# EAGLE board PreampUX (EAGLE 5.10)
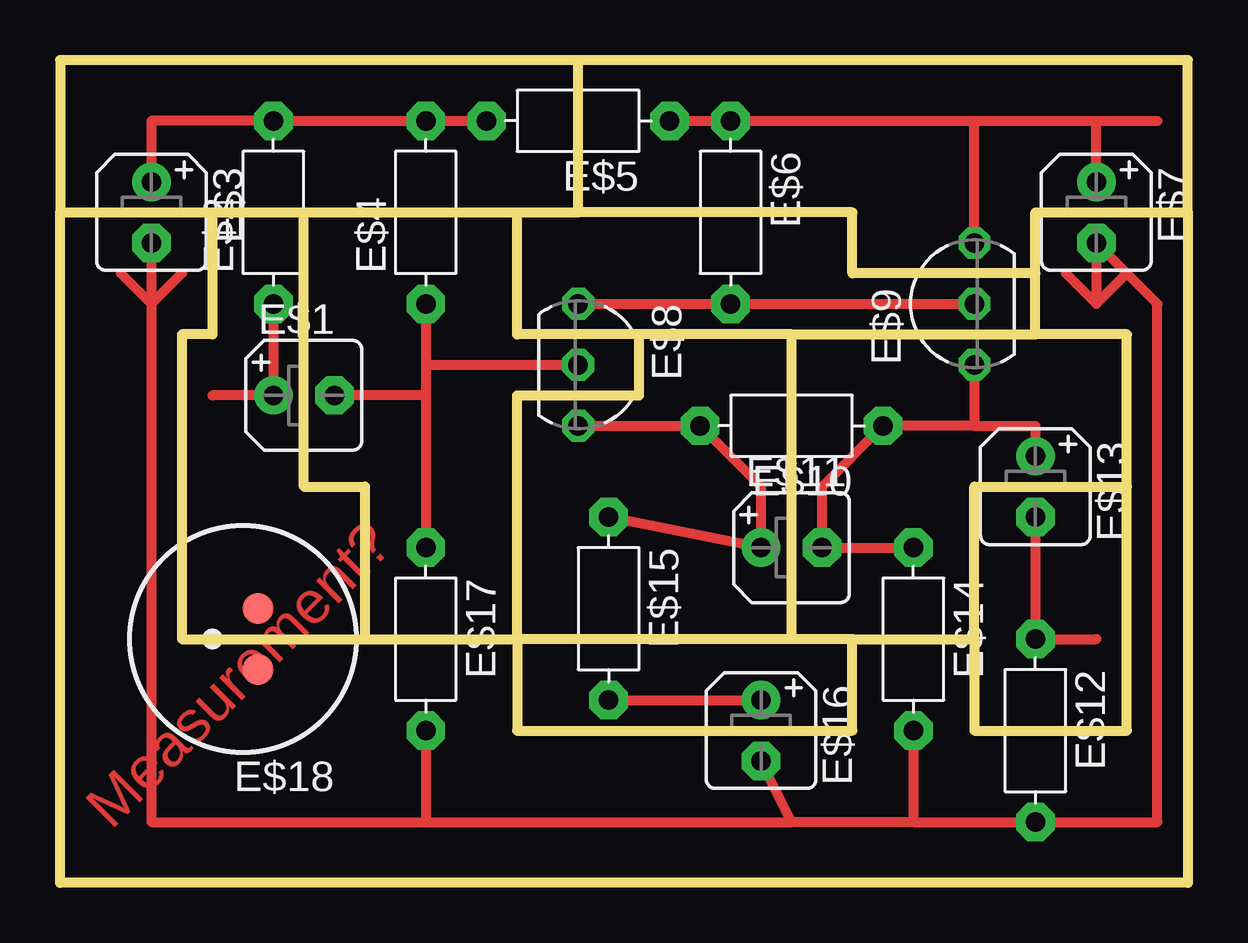
[diagram p0: board, top side]

Size 46.99 x 34.29 mm. Coordinates in mm from the lower left corner, seen from the top.
Outline: 6.35,27.94 6.35,22.86 5.08,22.86 5.08,16.51 5.08,10.16 12.7,10.16
Outline: 12.7,10.16 12.7,16.51 10.16,16.51 10.16,27.94
Outline: 12.7,10.16 13.97,10.16 19.05,10.16
Outline: 19.05,10.16 19.05,6.35 33.02,6.35 33.02,10.16
Outline: 33.02,10.16 38.1,10.16
Outline: 38.1,10.16 38.1,6.35 44.45,6.35 44.45,16.51
Outline: 44.45,16.51 44.45,22.86 40.64,22.86
Outline: 40.64,22.86 40.64,25.4
Outline: 40.64,25.4 40.64,27.94 46.99,27.94
Outline: 46.99,27.94 46.99,0 0,0 0,27.94
Outline: 0,27.94 6.35,27.94
Outline: 6.35,27.94 10.16,27.94
Outline: 10.16,27.94 19.05,27.94
Outline: 19.05,27.94 21.59,27.94
Outline: 21.59,27.94 21.59,34.29
Outline: 21.59,34.29 0,34.29 0,27.94
Outline: 46.99,27.94 46.99,34.29 21.59,34.29
Outline: 40.64,25.4 33.02,25.4 33.02,27.94 21.59,27.94
Outline: 38.1,10.16 38.1,16.51 44.45,16.51
Outline: 33.02,10.16 30.48,10.16
Outline: 30.48,10.16 30.48,22.86
Outline: 30.48,22.86 40.64,22.86
Outline: 30.48,10.16 19.05,10.16
Outline: 19.05,10.16 19.05,20.32 24.13,20.32 24.13,22.86
Outline: 24.13,22.86 19.05,22.86 19.05,27.94
Outline: 30.48,22.86 24.13,22.86
Copper layers (1*16): Top 0.035mm / dielectric 1.5mm / Bottom 0.035mm
Design rules "default": minimum track width 10mil, minimum drill 24mil, track to track 8mil, track to pad 8mil, pad to pad 8mil, via to via 8mil, smd to smd 8mil, copper to edge 40mil, drill to drill 8mil, minimum pad ring 10mil, minimum via ring 8mil, stop-mask expansion 4mil, vias tented up to drill 0mil, thermal gap 10mil

## Footprints (pad centres in the part's own frame; a part is rotated, then mirrored left to right if it is on the bottom)
B45181A = drill 0.813 pad 1.6 round: + -1.27,0 | drill 0.813 pad 1.6 octagon: - 1.27,0
R-7,5 = drill 0.813 pad 1.6 octagon: 1 -3.81,0; 2 3.81,0
TO92- = drill 0.813 octagon: 1 -2.54,0; 2 0,0; 3 2.54,0
F9745AL = smd 1.3 x 1.3: 1 -0.635,1.27; 2 -0.635,-1.27

## Placement (x,y rotation side)
E$1  100nf  [B45181A]  10.16,20.32 0 top
E$2  10k  [R-7,5]  8.89,27.94 90 top
E$3  10uf  [B45181A]  3.81,27.94 270 top
E$4  100k  [R-7,5]  15.24,27.94 90 top
E$5  2.2k  [R-7,5]  21.59,31.75 180 top
E$6  22k  [R-7,5]  27.94,27.94 270 top
E$7  100uf  [B45181A]  43.18,27.94 270 top
E$8  [TO92-]  21.59,21.59 270 top
E$9  [TO92-]  38.1,24.13 90 top
E$10  2.2k  [R-7,5]  30.48,19.05 180 top
E$11  1.5nf  [B45181A]  30.48,13.97 0 top
E$12  100k  [R-7,5]  40.64,6.35 270 top
E$13  10uf  [B45181A]  40.64,16.51 270 top
E$14  2.2k  [R-7,5]  35.56,10.16 270 top
E$15  100  [R-7,5]  22.86,11.43 270 top
E$16  22uf  [B45181A]  29.21,6.35 270 top
E$17  150k  [R-7,5]  15.24,10.16 270 top
E$18  [F9745AL]  7.62,10.16 180 top

## Library data of the parts
E$1 E$3 E$7 E$11 E$13 E$16 = rcl
E$2 E$4-E$6 E$10 E$12 E$14 E$15 E$17 = discrete
E$8 E$9 = maxim
E$18 = microphon

## Nets
S$1: E$1.+ E$2.1
S$2: E$2.2 E$3.+ E$4.2 E$5.2
S$3: E$3.- E$7.- E$12.2 E$14.2 E$16.- E$17.2
S$4: E$1.- E$4.1 E$8.2 E$17.1
S$5: E$5.1 E$7.+ E$9.3
S$7: E$6.2 E$8.1 E$9.2
S$8: E$8.3 E$10.2 E$11.+ E$15.1
S$9: E$9.1 E$10.1 E$11.- E$13.+ E$14.1
S$10: E$13.-
S$12: E$15.2 E$16.+

## Tracks (layer width: path | path; a pad name or v marks a point on that pad's centre or on a via)
S$1
  Top 0.406: 6.35,20.32 E$1.+ E$2.1
S$2
  Top 0.406: E$3.+ 3.81,31.75 E$2.2 E$4.2 E$5.2
S$3
  Top 0.406: E$3.- 3.81,24.13 | 5.08,25.4 3.81,24.13 | 3.81,24.13 2.54,25.4 | 3.81,24.13 3.81,2.54 15.24,2.54 | E$17.2 15.24,2.54 | E$14.2 35.56,2.54 | 35.56,2.54 E$12.2 45.72,2.54 45.72,24.13 E$7.- 43.18,24.13 | 35.56,2.54 30.48,2.54 | 30.48,2.54 E$16.- | 15.24,2.54 30.48,2.54 | 43.18,24.13 44.45,25.4 | 43.18,24.13 41.91,25.4
S$4
  Top 0.406: E$4.1 15.24,21.59 | 15.24,21.59 15.24,20.32 | 15.24,20.32 E$1.- | 15.24,21.59 E$8.2 | 15.24,20.32 E$17.1
S$5
  Top 0.406: E$5.1 38.1,31.75 | 38.1,31.75 43.18,31.75 | 43.18,31.75 45.72,31.75 | E$7.+ 43.18,31.75 | E$9.3 38.1,31.75
S$7
  Top 0.406: E$8.1 E$6.2 E$9.2
S$8
  Top 0.406: E$8.3 E$10.2 29.21,16.51 E$11.+ E$15.1
S$9
  Top 0.406: E$9.1 38.1,19.05 | 38.1,19.05 E$10.1 31.75,16.51 E$11.- E$14.1 | 38.1,19.05 40.64,19.05 E$13.+
S$10
  Top 0.406: E$13.- 40.64,10.16 43.18,10.16
S$12
  Top 0.406: E$15.2 E$16.+

## Text on the board
Unrouted: 12v | e | bc548b | C | b | B | c | bc558b | input | E | out